# Altium PCB LIFT_CARD.PcbDoc
Units mil, origin at the board's own origin, x right, y up, seen from the top; angles counter-clockwise.
Board outline 2275 x 2920 mil, 2 copper layers (Top Layer, Bottom Layer), stack 54.768 mil thick; 39 components, 26 nets, 146 pads, 688 vias.
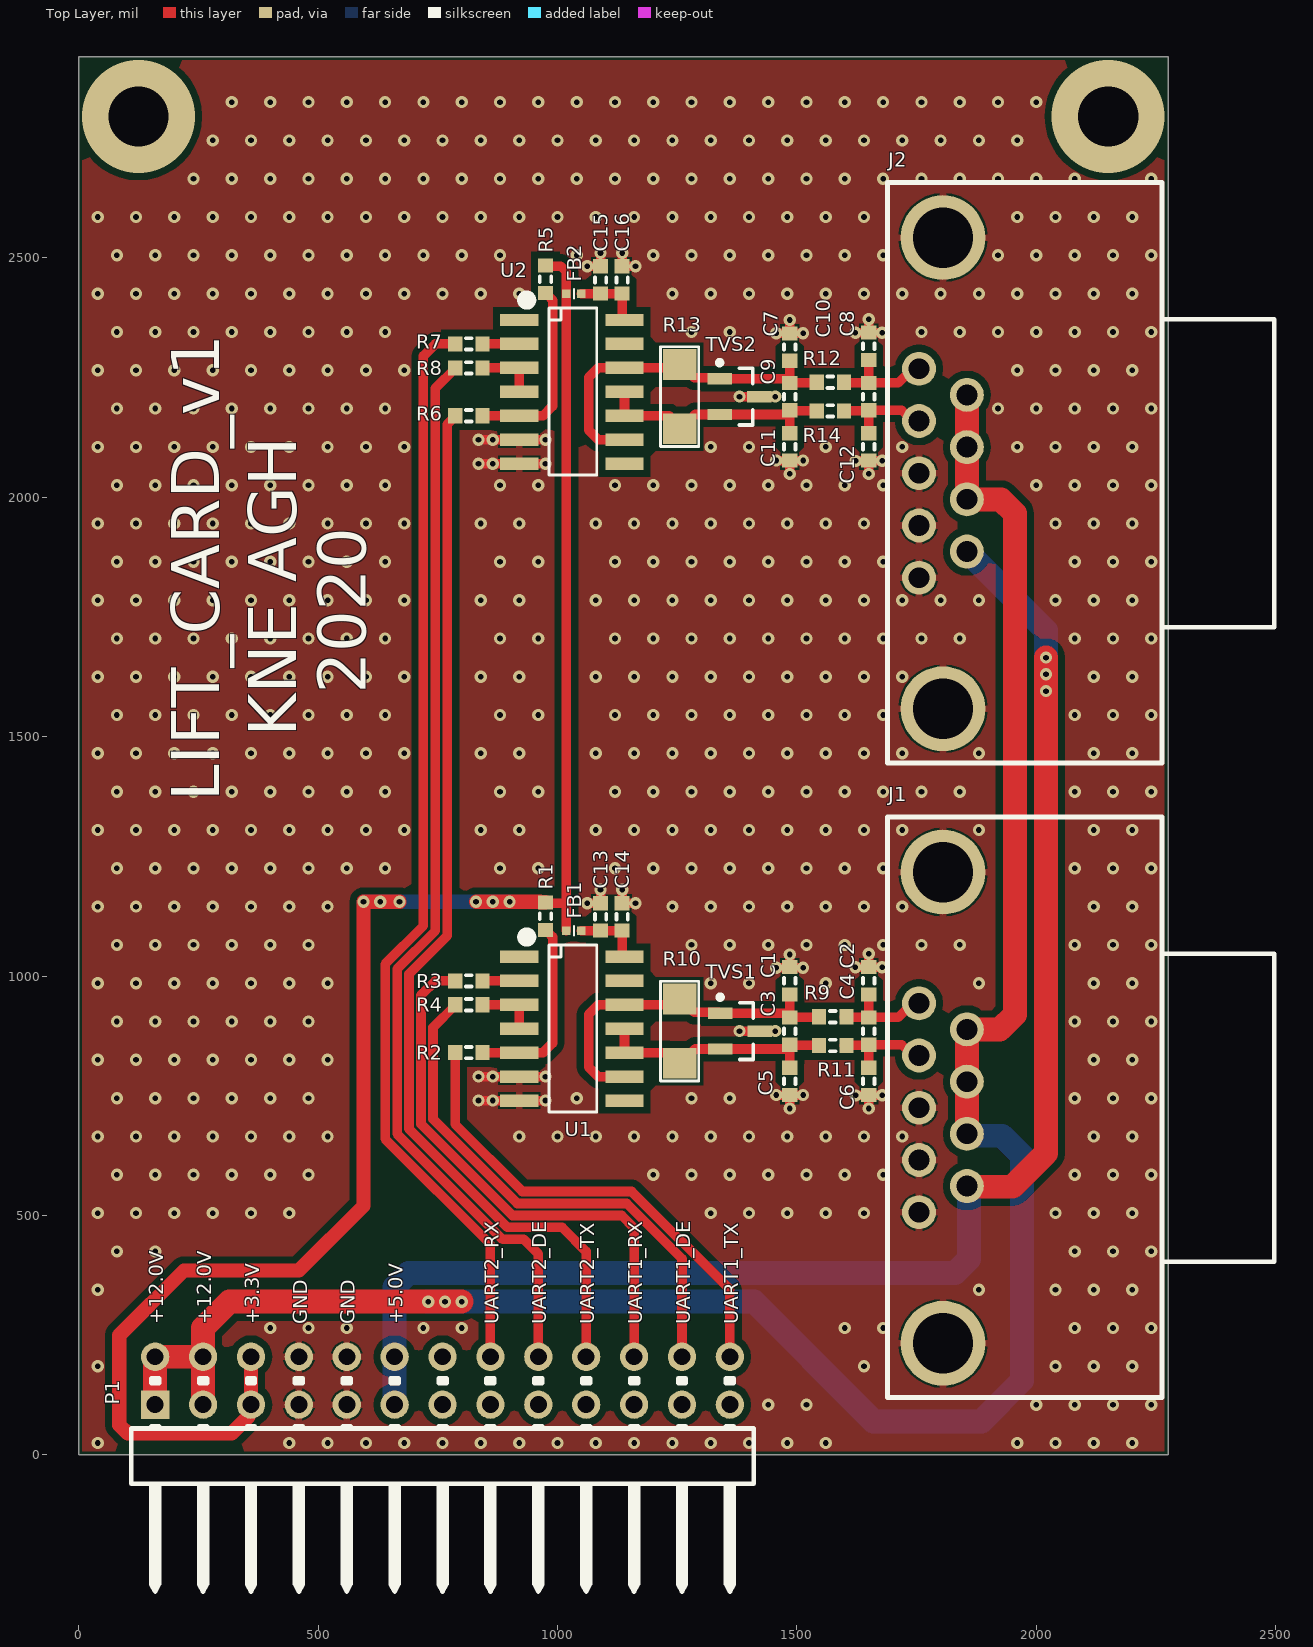
[diagram p0: Top Layer view]
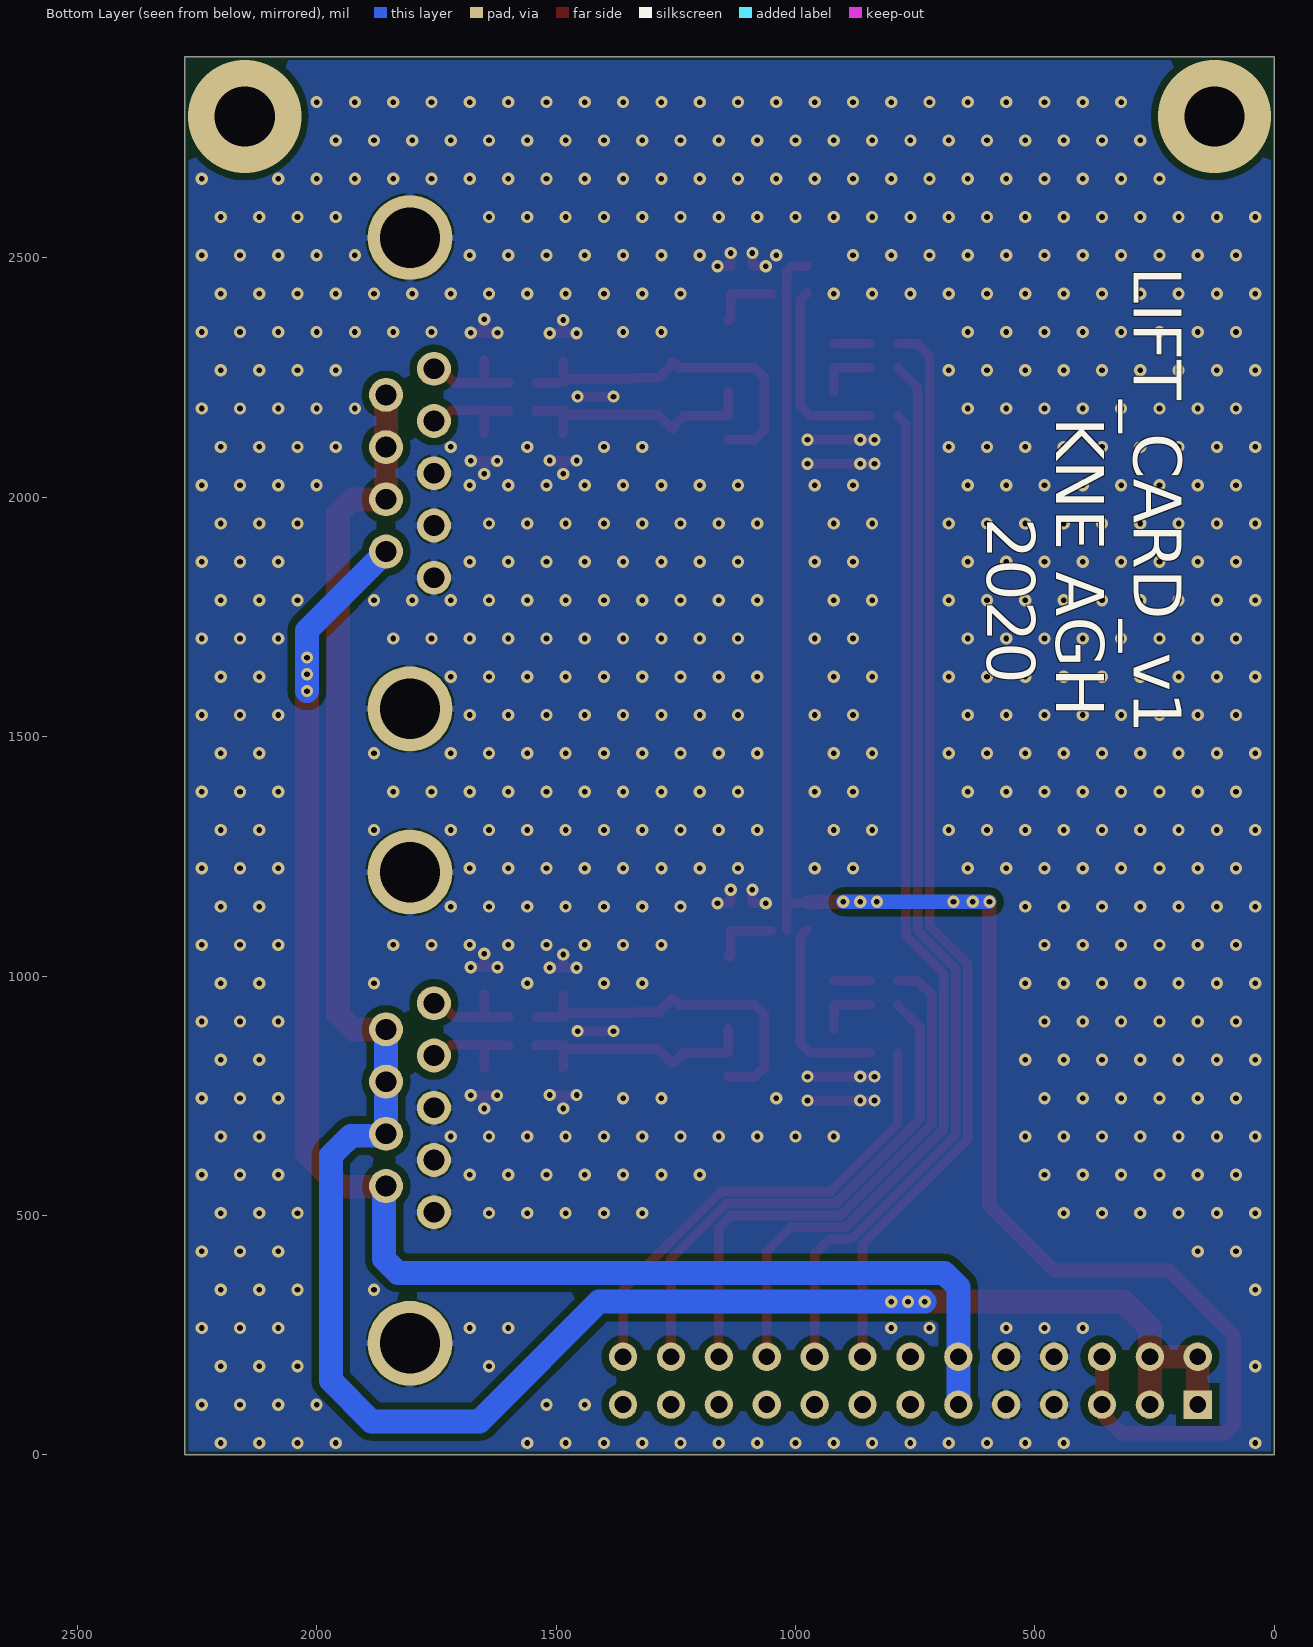
[diagram p1: Bottom Layer view, seen from below]
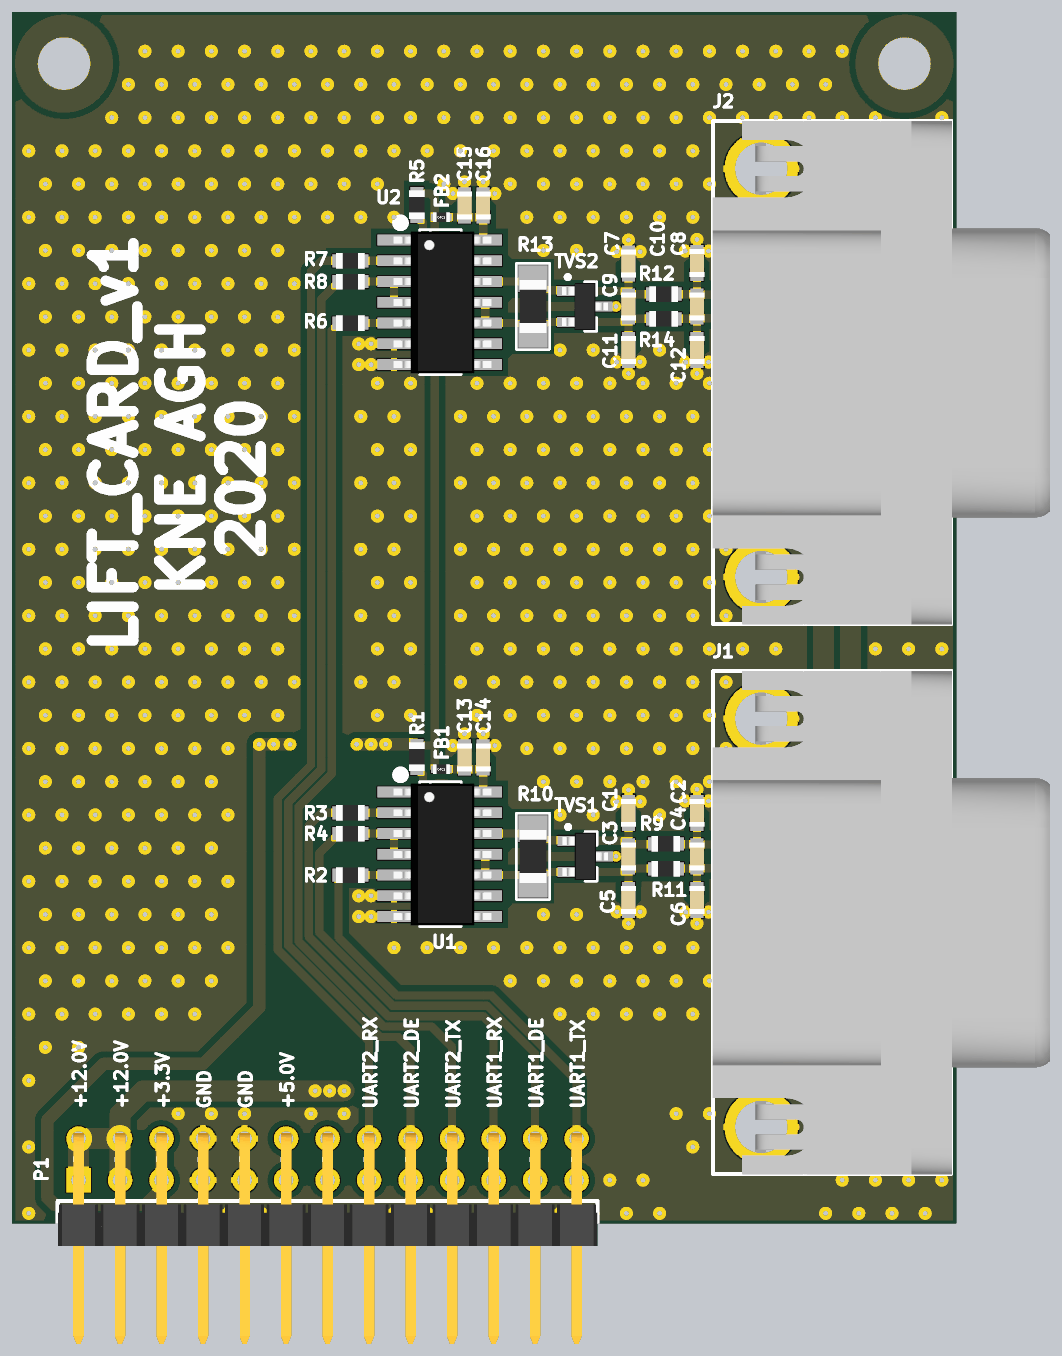
[diagram p2: 3D render of the assembled board from above, using the file's embedded part models]

## Layer stack, top to bottom
Top Solder: solder mask 0.4, Solder Resist, Dk 3.5
Top Layer: signal copper 1.4
Dielectric 1: dielectric 51.9685, FR-4, Dk 4.8
Bottom Layer: signal copper 1.4
Bottom Solder: solder mask 0.4, Solder Resist, Dk 3.5

## Board outline
0,0 2275,0 2275,2920 0,2920

## Design rules (kind name [scope] priority, off if disabled: settings)
BoardOutlineClearance P1 [All] p1: gap=7.87 ignorepadtopadclearanceinfootprint=FALSE
BoardOutlineClearance [All] p2: gap=7.87 ignorepadtopadclearanceinfootprint=FALSE
Clearance [All] p1: gap=5 ignorepadtopadclearanceinfootprint=FALSE except(7.87: Track-SMDPad; 10: Track-Hole Via-Via; 12.99: Track-THPad; 15: Arc-Poly Track-Poly SMDPad-Poly THPad-Poly Via-Poly Fill-Poly Poly-Poly Poly-Region Poly-Text Poly-Hole; 21.26: THPad-THPad)
ComponentClearance [All] p1: gap=4 collisioncheckmode=3 verticalgap=4 showdistances=TRUE
DiffPairsRouting [All] p1: maxlimit=4 minlimit=4 mostfreqgap=4 toplayer_minwidth=4 toplayer_maxwidth=71497.94 toplayer_prefwidth=4 bottomlayer_minwidth=4 bottomlayer_maxwidth=71497.94 bottomlayer_prefwidth=4 maxuncoupledlength=500
Height [All] p1: minheight=0 maxheight=71497.94 prefheight=500
HoleSize [All] p1: absolutevalues=TRUE maxlimit=248.03 minlimit=7.87 maxpercent=80.000 minpercent=20.000
HoleToHoleClearance [All] p1: gap=10 allowstackedmicrovias=FALSE
MinimumAnnularRing [All] p1: minimumring=5.12
MinimumSolderMaskSliver [All] p1: minsoldermaskwidth=0
PlaneClearance [All] p1: clearance=6
PlaneConnect [All] p1: pad.planeconnectstyle=Relief pad.reliefexpansion=11.81 pad.reliefentries=4 pad.reliefconductorwidth=15 pad.reliefairgap=4 via.planeconnectstyle=Direct via.reliefexpansion=11.81 via.reliefentries=4 via.reliefconductorwidth=5 via.reliefairgap=5
PolygonConnect [All] p1: thpad.connectstyle=Relief thpad.reliefconductorwidth=15 thpad.reliefentries=4 thpad.polygonreliefangle="90 Angle" thpad.airgapwidth=4 smdpad.connectstyle=Relief smdpad.reliefconductorwidth=15 smdpad.reliefentries=4 smdpad.polygonreliefangle="90 Angle" smdpad.airgapwidth=4 via.connectstyle=Direct via.reliefconductorwidth=5 via.reliefentries=4 via.polygonreliefangle="90 Angle" via.airgapwidth=5
RoutingVias [All] p1: holewidth=7.87 width=17.72 viastyle="Through Hole" minholewidth=7.87 minwidth=17.72 maxholewidth=248.03 maxwidth=257.87
SilkToSilkClearance [All] p1: silktosilkclearance=1
SilkToSolderMaskClearance [IsPad] p1: minsilkscreentomaskgap=2 clearancetoexposedcopper=TRUE
SolderMaskExpansion SolderMaskExpansion_VIA [IsVia] p1: expansion=-20 istentingtop=FALSE
SolderMaskExpansion [All] p2: expansion=2.95 istentingtop=FALSE
UnRoutedNet [All] p1: checkbadconnections=TRUE
Width [All] p1: maxlimit=200 minlimit=5 preferedwidth=6
19 further rules are at their usual default settings.

## Classes and differential pairs
channel class RS485_FD: Designator1
channel class protection: Designator1
component class LIFT_CARD: J1 J2 R1 R2 R3 R4 R5 R6 R7 R8
component class Designator1: C15 C16 FB2 U2
component class Designator2: C13 C14 FB1 U1

## Components (designator, comment, footprint, x,y, rotation, side; value= is the part's Value field where it differs from the comment)
C1 "Ceramic C0G" C_0603_1608 1485,990 r90 top value=1nF (schematic designator C26)
C2 "Ceramic C0G" C_0603_1608 1650,990 r90 top value=100pF (schematic designator C27)
C3 "Ceramic C0G" C_0603_1608 1485,885 r270 top value=1nF (schematic designator C28)
C4 "Ceramic C0G" C_0603_1608 1650,885 r270 top value=100pF (schematic designator C29)
C5 "Ceramic C0G" C_0603_1608 1485,780 r270 top value=1nF (schematic designator C30)
C6 "Ceramic C0G" C_0603_1608 1650,780 r270 top value=100pF (schematic designator C31)
C7 "Ceramic C0G" C_0603_1608 1485,2313.54 r90 top value=1nF (schematic designator C26)
C8 "Ceramic C0G" C_0603_1608 1650,2315 r90 top value=100pF (schematic designator C27)
C9 "Ceramic C0G" C_0603_1608 1485,2210 r270 top value=1nF (schematic designator C28)
C10 "Ceramic C0G" C_0603_1608 1650,2210 r270 top value=100pF (schematic designator C29)
C11 "Ceramic C0G" C_0603_1608 1485,2105 r270 top value=1nF (schematic designator C30)
C12 "Ceramic C0G" C_0603_1608 1650,2105 r270 top value=100pF (schematic designator C31)
C13 "Ceramic X7R" C_0603_1608 1090,1123.54 r90 top value=1uF (schematic designator C24)
C14 "Ceramic X7R" C_0603_1608 1135,1123.54 r90 top value=100nF (schematic designator C25)
C15 "Ceramic X7R" C_0603_1608 1090,2453.54 r90 top value=1uF (schematic designator C24)
C16 "Ceramic X7R" C_0603_1608 1135,2453.54 r90 top value=100nF (schematic designator C25)
FB1 "Ferrite bead" FB_0402_1005 1034.25,1095 r0 top value=BLM15EG121SH1D (schematic designator FB3)
FB2 "Ferrite bead" FB_0402_1005 1034.25,2425 r0 top value=BLM15EG121SH1D (schematic designator FB3)
J1 "DSUB 9 Pin" P_DSUB_2301843-1 1805,725 r90 top locked value=2301843-1
J2 "DSUB 9 Pin" P_DSUB_2301843-1 1805,2050 r90 top locked value=2301843-1
P1 "Goldpin male" P_HEADER_2x13_2.54_RIGHT_ANGLE 760,155 r0 top locked value=HMTSW-113-07-T-D-130-RA
R1 "Resistor" R_0603_1608 975,1125 r90 top value=100k
R2 "Resistor" R_0603_1608 815,840 r0 top value=10R
R3 "Resistor" R_0603_1608 815,990 r180 top value=10R
R4 "Resistor" R_0603_1608 815,940 r0 top value=10R
R5 "Resistor" R_0603_1608 975,2455 r90 top value=100k
R6 "Resistor" R_0603_1608 815,2170 r0 top value=10R
R7 "Resistor" R_0603_1608 815,2320 r180 top value=10R
R8 "Resistor" R_0603_1608 815,2270 r0 top value=10R
R9 "Resistor" R_0603_1608 1575,915 r180 top value=10R (schematic designator R15)
R10 "Resistor" R_1206_3216 1255,885 r90 top value=120R (schematic designator R16)
R11 "Resistor" R_0603_1608 1575,855 r180 top value=10R (schematic designator R28)
R12 "Resistor" R_0603_1608 1570,2240 r180 top value=10R (schematic designator R15)
R13 "Resistor" R_1206_3216 1255,2210 r90 top value=120R (schematic designator R16)
R14 "Resistor" R_0603_1608 1570,2180 r180 top value=10R (schematic designator R28)
TVS1 "TVS double bidirectional" SOT23_N 1381.05,885 r0 top value=CDSOT23-SM712 (schematic designator TVS5)
TVS2 "TVS double bidirectional" SOT23_N 1380,2210 r0 top value=CDSOT23-SM712 (schematic designator TVS5)
U1 "MAX3076 Series 16 Mbps 6 V Full Duplex SMT RS 485 Transceiver - SOIC-14" SOP14_SO14_SOIC14_4X9X18 1030,890 r270 top value=MAX3076EASD+
U2 "MAX3076 Series 16 Mbps 6 V Full Duplex SMT RS 485 Transceiver - SOIC-14" SOP14_SO14_SOIC14_4X9X18 1030,2220 r270 top value=MAX3076EASD+ (schematic designator U1)

## Footprints (in the part's own frame and the unit in brackets; to place one, negate y for a bottom-side part, rotate by r counter-clockwise, add the part's x,y. Pads: shape width x height; smd on the part's side, far side on the other; paste and mask are expansions set on the pad)
C_0603_1608 [mm]
  rect 0.75x0.8 smd: 1(-0.725,0) 2(0.725,0)
  silkscreen extent -0.15,-0.3 0.15,0.3, body extent -0.85,-0.45 0.85,0.45, height 0.89
FB_0402_1005 [mm]
  rect 0.45x0.45 smd: 1(-0.4,0) 2(0.4,0)
  silkscreen extent 0,-0.25 0,0.25, body extent -0.52,-0.3 0.52,0.3, height 0.34
P_DSUB_2301843-1 [mm] "D-SUB; 9 Position; Male"
  round 1.8 hole 1.1: 1(-5.54,1.27) 2(-2.77,1.27) 3(0,1.27) 4(2.77,1.27) 5(5.54,1.27) 6(-4.155,-1.27) 7(-1.385,-1.27) 8(1.385,-1.27) 9(4.155,-1.27)
  round 4.5 hole 3.2: MH(-12.495,0) MH(12.495,0)
  silkscreen extent -15.37,-17.58 15.42,2.95, body extent -15.4,-17.68 15.41,2.97, height 13.59
P_HEADER_2x13_2.54_RIGHT_ANGLE [mm] "Connector; Header; 2x13 Position; Male"
  rect 1.5x1.5 hole 0.9: 1(-15.24,-1.27)
  round 1.5 hole 0.9: 2(-15.24,1.27) 3(-12.7,-1.27) 4(-12.7,1.27) 5(-10.16,-1.27) 6(-10.16,1.27) 7(-7.62,-1.27) 8(-7.62,1.27) 9(-5.08,-1.27) 10(-5.08,1.27) 11(-2.54,-1.27) 12(-2.54,1.27) 13(0,-1.27) 14(0,1.27) 15(2.54,-1.27) 16(2.54,1.27) 17(5.08,-1.27) 18(5.08,1.27) 19(7.62,-1.27) 20(7.62,1.27) 21(10.16,-1.27) 22(10.16,1.27) 23(12.7,-1.27) 24(12.7,1.27) 25(15.24,-1.27) 26(15.24,1.27)
  silkscreen extent -16.51,-11.18 16.51,0.13, body extent -16.51,-11.3 16.51,1.6, height 5.1
R_0603_1608 [mm]
  rect 0.75x0.8 smd: 1(-0.725,0) 2(0.725,0)
  silkscreen extent -0.15,-0.3 0.15,0.3, body extent -0.87,-0.47 0.88,0.48, height 0.54
R_1206_3216 [mil]
  rect 64x70 smd: 1(-67,0) 2(67,0)
  silkscreen extent -104,-40 104,40, body extent -64,-32 64,32, height 27
SOP14_SO14_SOIC14_4X9X18 [mil]
  rect 26x80 smd: 1(-150,-110) 2(-100,-110) 3(-50,-110) 4(0,-110) 5(50,-110) 6(100,-110) 7(150,-110) 8(150,110) 9(100,110) 10(50,110) 11(0,110) 12(-50,110) 13(-100,110) 14(-150,110)
  silkscreen extent -201,-104 174,52, body extent -171,-111 171,125, height 63
SOT23_N [mm] "SOT23, 3-Leads, Body 2.9x1.3mm, Pitch 0.95mm, Lead Span 2.3mm, IPC Medium Density"
  rect 1.3x0.6 smd: 1(-1.05,0.95) 2(-1.05,-0.95) 3(1.05,0)
  silkscreen extent -1.17,-1.5 0.7,1.92, body extent -1.4,-1.45 1.4,1.45, height 1.29

## Part data
C1 C3 C5 C7 C9 C11: library part C_1nF_50V_C0G_0603_5, "Capacitor", dielectric=C0G, Manufacturer=Samsung, Manufacturer Part Number=CL10C102JB8NNNC, Tolerance (%)=5, Voltage=50V, HelpURL=http://www.tme.eu/pl/Document/7da762c1dbaf553c64ad9c40d3603826/mlcc_samsung.pdf, Part Number=C_1nF_50V_C0G_0603_5, SCH_Footprint=0603, Supplier 1=TME, Supplier 2="RS Components", Supplier 3=Farnell, Supplier 4=Mouser, Supplier 5=Digi-Key, Supplier Part Number 1=CL10C102JB8NNNC
C2 C4 C6 C8 C10 C12: library part C_100pF_50V_C0G_0603_5, "Capacitor", dielectric=C0G, Manufacturer=AVX, Manufacturer Part Number=06035A101JAT2A, Tolerance (%)=5, Voltage=50V, HelpURL=http://www.tme.eu/pl/Document/28556c2a4dfa60995042b7f5f1edb9ed/AVX-C0G.pdf, Part Number=C_100pF_50V_C0G_0603_5, SCH_Footprint=0603, Supplier 1=TME, Supplier 2="RS Components", Supplier 3=Farnell, Supplier 4=Mouser, Supplier 5=Digi-Key, Supplier Part Number 1=06035A101JAT2A
C13 C15: library part C_1uF_25V_X7R_0603_10, "Capacitor", dielectric=X7R, Manufacturer=Samsung, Manufacturer Part Number=CL10B105KA8NNNC, Tolerance (%)=10, Voltage=25V, HelpURL=http://www.tme.eu/pl/Document/4a42202b32dab16128fe107dd69598cc/samsung-chip-cap.pdf, Part Number=C_1uF_25V_X7R_0603_10, SCH_Footprint=0603, Supplier 1=TME, Supplier 2="RS Components", Supplier 3=Farnell, Supplier 4=Mouser, Supplier 5=Digi-Key, Supplier Part Number 1=CL10B105KA8NNNC
C14 C16: library part C_100nF_50V_X7R_0603_5, "Capacitor", dielectric=X7R, Manufacturer=Samsung, Manufacturer Part Number=CL10B104JB8NNNC, Tolerance (%)=5, Voltage=50V, HelpURL=http://www.tme.eu/pl/Document/4a42202b32dab16128fe107dd69598cc/samsung-chip-cap.pdf, Part Number=C_100nF_50V_X7R_0603_5, SCH_Footprint=0603, Supplier 1=TME, Supplier 2="RS Components", Supplier 3=Farnell, Supplier 4=Mouser, Supplier 5=Digi-Key, Supplier Part Number 1=CL10B104JB8NNNC
FB1 FB2: library part FB_BLM15EG121SH1D, "Ferrite Bead", Current=1.5A, Manufacturer=Murata, Manufacturer Part Number=BLM15EG121SH1D, Resistance=95mR, HelpURL=http://datasheet.octopart.com/BLM15EG121SH1D-Murata-datasheet-37129980.pdf, Part Number=FB_BLM15EG121SH1D, SCH_Footprint=0402, Supplier 1=TME, Supplier 2="RS Components", Supplier 3=Farnell, Supplier 4=Mouser, Supplier 5=Digi-Key, Supplier Part Number 4=81-BLM15EG121SH1D, Supplier Part Number 5=490-17344-1-ND
J1 J2: library part P_DSUB_2301843-1, "Header, 9-Pin", Manufacturer="TE Conectivity", Manufacturer Part Number=2301843-1, HelpURL=https://pl.mouser.com/datasheet/2/418/1/NG_CD_2301843_H-1517790.pdf, Part Number=P_DSUB_2301843-1, SCH_Footprint=P_DSUB, Supplier 1=TME, Supplier 2="RS Components", Supplier 3=Farnell, Supplier 4=Mouser, Supplier 5=Digi-Key, Supplier 6=LCSC, Supplier Part Number 3=2857982, Supplier Part Number 4=571-2301843-1, Supplier Part Number 5=A132510-ND
P1: library part P_HEADER_2x13_2.54_ANGLE, "Pin Header", Manufacturer=Samtec, Manufacturer Part Number=HMTSW-113-07-T-D-130-RA, HelpURL=https://datasheet.octopart.com/HMTSW-113-07-T-D-130-RA-Samtec-datasheet-97080704.pdf, Part Number=P_HEADER_2x13_2.54_ANGLE, SCH_Footprint="2x13 2.54mm", Supplier 1=TME, Supplier 2="RS Components", Supplier 3=Farnell, Supplier 4=Mouser, Supplier 5=Digi-Key, Supplier 6=LCSC, Supplier Part Number 4=200-HMTSW1137TD130RA, Supplier Part Number 5=HMTSW-113-07-T-D-130-RA-ND
R1 R5: library part R_100k_0603_1, Manufacturer=Royalohm, Manufacturer Part Number=0603SAF1003T5E, Power=100mW, Supplier Part Number 1=SMD0603-100K-1%, Tolerance=1%, Voltage=50V, HelpURL=http://www.tme.eu/pl/Document/b315665a56acbc42df513c99b390ad98/ROYALOHM-THICKFILM.pdf, Part Number=R_100k_0603_1, SCH_Footprint=0603, Supplier 1=TME, Supplier 2="RS Components", Supplier 3=Farnell, Supplier 4=Mouser, Supplier 5=Digi-Key, Supplier 6=LCSC, Supplier Part Number 4=667-ERJ-3EKF1003V, Supplier Part Number 5=P100KHCT-ND
R2 R3 R4 R6 R7 R8 R9 R11 R12 R14: library part R_10R_0603_1, Manufacturer=Royalohm, Manufacturer Part Number=0603SAF100JT5E, Power=100mW, Supplier Part Number 1=SMD0603-10R-1%, Tolerance=1%, Voltage=50V, HelpURL=http://www.tme.eu/pl/Document/b315665a56acbc42df513c99b390ad98/ROYALOHM-THICKFILM.pdf, Part Number=R_10R_0603_1, SCH_Footprint=0603, Supplier 1=TME, Supplier 2="RS Components", Supplier 3=Farnell, Supplier 4=Mouser, Supplier 5=Digi-Key
R10 R13: library part R_120R_1206_1, Manufacturer=Vishay, Manufacturer Part Number=CRCW1206120RFKEA, Power=250mW, Tolerance=1%, Voltage=200V, HelpURL=http://www.farnell.com/datasheets/2310790.pdf, Part Number=R_120R_1206_1, SCH_Footprint=1206, Supplier 1=TME, Supplier 2="RS Components", Supplier 3=Farnell, Supplier 4=Mouser, Supplier 5=Digi-Key, Supplier Part Number 2=6791787, Supplier Part Number 3=1653057, Supplier Part Number 4=71-CRCW1206-120-E3, Supplier Part Number 5=541-120FCT-ND
TVS1 TVS2: library part TVS_CDSOT23-SM712, Current=17A, Manufacturer=Bourns, Manufacturer Part Number=CDSOT23-SM712, Voltage=12V, HelpURL=https://datasheet.octopart.com/CDSOT23-SM712-Bourns-datasheet-13451680.pdf, Part Number=TVS_CDSOT23-SM712, SCH_Footprint=SOT23, Supplier 1=TME, Supplier 2="RS Components", Supplier 3=Farnell, Supplier 4=Mouser, Supplier 5=Digi-Key, Supplier Part Number 2=7673728, Supplier Part Number 3=1824869, Supplier Part Number 4=652-CDSOT23-SM712, Supplier Part Number 5=CDSOT23-SM712CT-ND
U1 U2: library part U_MAX3076EASD+, "RS-485/RS-422 Transceivers, +3.3V,  ±15kV ESD-Protected, Fail-Safe, Hot-Swap", Manufacturer="Maxim Integrated", Manufacturer Part Number=MAX3076EASD+, HelpURL=https://sigma.octopart.com/138901689/technical_drawing/Maxim-Integrated-MAX3076EASD%2B.pdf, Part Number=U_MAX3076EASD+, SCH_Footprint=SO14, Supplier 1=TME, Supplier 2="RS Components", Supplier 3=Farnell, Supplier 4=Mouser, Supplier 5=Digi-Key, Supplier Part Number 3=2511650, Supplier Part Number 4=700-MAX3076EASD, Supplier Part Number 5=MAX3076EASD+-ND

## Via types
v1: diameter 25.59, hole 11.81, Top Layer to Bottom Layer, 686 vias
v2: diameter 236.22, hole 125.98, Top Layer to Bottom Layer, 2 vias

## Nets (pads, with @x,y where several pads share a name; then routed paths per layer and width w, separated by ;. In a path a pad name is that pad's centre, name@x,y a point inside that pad or via, vN(x,y) a via of type N, cw(c..) or ccw(c..) an arc to the next point about the centre after c; other vN are vias at no path point)
+3.3V: FB1.1 FB2.1 P1.5 P1.6 R1.2 R5.2 | length 3856.4
  Top Layer w20: R1.2 976.15,1152.39 1018.5,1152.39 ; R5.2 976.15,2482.39 1006.79,2482.39 1018.5,2470.68 FB2.1 1018.5,1152.39 ; FB1.1 1018.5,1152.39
  Top Layer w30: P1.6 P1.5 354.44,99.44 354.44,79.44 320,45 102.57,45 85,62.57 85,250 220,385 460,385 595,520 v1(595,1155) v1(630,1155) v1(670,1155) ; v1(830,1155) v1(865,1155) v1(900,1155) 963.91,1155 965.13,1153.78 R1.2@974.25,1153.78
  Bottom Layer w30: v1(595,1155) v1(630,1155) v1(670,1155) v1(830,1155) v1(865,1155) v1(900,1155)
+5.0V: J1.6 J2.6 P1.11 P1.12 | length 3212.1
  Top Layer w50: J1.6 1856.42,560 1950,560 2020,630 v1(2020,1595) v1(2020,1630) v1(2020,1665)
  Bottom Layer w50: P1.11 660,350.71 689.29,380 1829.7,380 1858.99,409.29 1858.99,557.42 J1.6 ; J2.6 2020,1721.42 v1(2020,1665) v1(2020,1630) v1(2020,1595)
+12.0V: J1.7 J1.8 J1.9 J2.7 J2.8 J2.9 P1.1 P1.2 P1.3 P1.4 | length 4831
  Top Layer w50: P1.1 P1.2 P1.4 ; P1.3 P1.4 ; v1(800,320) v1(765,320) 315,320 260,265 P1.4 ; J1.7 J1.8 J1.9 1923.58,888.58 1955,920 1955,1966.18 1925.71,1995.47 J2.7 J2.8 J2.9
  Bottom Layer w50: v1(730,320) v1(765,320) v1(800,320) 1410,320 1645.05,84.95 1660,70 1885,70 1970,155 1970,625 1954.95,640.05 1928.52,666.48 1858.99,666.48 J1.7 J1.8 J1.9
GND: C1.2 C2.2 C5.2 C6.2 C7.2 C8.2 C11.2 C12.2 C13.2 C14.2 C15.2 C16.2 J1.1 J1.2 J1.3 J1.MH J2.1 J2.2 J2.3 J2.MH P1.7 P1.8 P1.9 P1.10 TVS1.3 TVS2.3 U1.6 U1.7 U2.6 U2.7 | length 1994.9
  Top Layer w20: v1(835,740) v1(865,740) U1.7 v1(975,740) ; v1(835,790) v1(865,790) U1.6 v1(975,790) ; v1(1062.09,1152.09) C13.2 v1(1090,1180) ; v1(1135,1180) C14.2 v1(1162.91,1152.09) ; v1(1380,885) v1(1455,885) ; v1(1380,2210) TVS2.3 v1(1455,2210) ; v1(1457.09,751.46) C5.2 ; v1(1457.09,1017.09) C1.2@1485,1017.09 ; v1(1457.09,2076.46) C11.2 ; v1(1457.09,2342.09) C7.2 ; v1(1485,723.54) C5.2 ; v1(1485,1045) C1.2@1485,1017.09 ; v1(1485,2048.54) C11.2 ; v1(1485,2370) C7.2 ; v1(1512.91,751.46) C5.2 ; v1(1512.91,1017.09) C1.2@1485,1017.09 ; v1(1512.91,2076.46) C11.2 ; v1(1512.91,2342.09) C7.2 ; v1(1622.09,1018.54) C2.2 ; v1(1622.09,2343.54) C8.2 ; v1(1623.1,750.76) C6.2@1651.01,750.76 ; v1(1623.1,2075.76) C12.2@1651.01,2075.76 ; v1(1650,723.54) C6.2 ; v1(1650,1046.46) C2.2 ; v1(1650,2048.54) C12.2 ; v1(1650,2371.46) C8.2 ; C6.2@1650.13,751.06 v1(1678.04,751.06) ; C12.2@1650.13,2076.06 v1(1678.04,2076.06) ; v1(1677.91,1018.54) C2.2 ; v1(1677.91,2343.54) C8.2 ; v1(865,2070) U2.7 ; v1(865,2070) v1(835,2070) v1(865,2070) ; v1(865,2070) U2.7 ; v1(865,2120) U2.6 ; v1(865,2120) v1(835,2120) v1(865,2120) ; v1(865,2120) U2.6 ; U2.7 v1(975,2070) U2.7 ; U2.6 v1(975,2120) U2.6 ; C15.2 v1(1090,2510) C15.2 ; C15.2 v1(1062.09,2482.09) C15.2 ; C16.2 v1(1135,2510) C16.2 ; C16.2 v1(1162.91,2482.09) C16.2
  other v1: 40,25 440,25 520,25 600,25 680,25 760,25 840,25 920,25 1000,25 1080,25 1160,25 1240,25 1320,25 1400,25 1480,25 1560,25 1960,25 2040,25 2120,25 2200,25 1440,105 1520,105 2000,105 2080,105 2160,105 2240,105 40,185 1640,185 2040,185 2120,185 2200,185 400,265 480,265 560,265 720,265 800,265 1600,265 1680,265 2080,265 2160,265 2240,265 40,345 1880,345 2040,345 2120,345 2200,345 80,425 160,425 2080,425 2160,425 2240,425 40,505 120,505 200,505 280,505 360,505 440,505 1320,505 1400,505 1480,505 1560,505 1640,505 2040,505 2120,505 2200,505 80,585 160,585 240,585 320,585 400,585 480,585 1200,585 1280,585 1360,585 1440,585 1520,585 1600,585 1680,585 2080,585 2160,585 2240,585 40,665 120,665 200,665 280,665 360,665 440,665 520,665 920,665 1000,665 1080,665 1160,665 1240,665 1320,665 1400,665 1480,665 1560,665 1640,665 1720,665 2120,665 2200,665 80,745 160,745 240,745 320,745 400,745 480,745 1040,745 1280,745 1360,745 2080,745 2160,745 2240,745 40,825 120,825 200,825 280,825 360,825 440,825 520,825 2120,825 2200,825 80,905 160,905 240,905 320,905 400,905 480,905 2080,905 2160,905 2240,905 40,985 120,985 200,985 280,985 360,985 440,985 520,985 1320,985 1400,985 1560,985 1880,985 2120,985 2200,985 80,1065 160,1065 240,1065 320,1065 400,1065 480,1065 1280,1065 1360,1065 1440,1065 1520,1065 1600,1065 1680,1065 1760,1065 1840,1065 2080,1065 2160,1065 2240,1065 40,1145 120,1145 200,1145 280,1145 360,1145 440,1145 520,1145 1240,1145 1320,1145 1400,1145 1480,1145 1560,1145 1640,1145 1720,1145 2120,1145 2200,1145 80,1225 160,1225 240,1225 320,1225 400,1225 480,1225 560,1225 640,1225 880,1225 960,1225 1120,1225 1200,1225 1280,1225 1360,1225 1440,1225 1520,1225 1600,1225 1680,1225 2080,1225 2160,1225 2240,1225 40,1305 120,1305 200,1305 280,1305 360,1305 440,1305 520,1305 600,1305 680,1305 840,1305 920,1305 1080,1305 1160,1305 1240,1305 1320,1305 1400,1305 1480,1305 1560,1305 1640,1305 1720,1305 1880,1305 2120,1305 2200,1305 80,1385 160,1385 240,1385 320,1385 400,1385 480,1385 560,1385 640,1385 880,1385 960,1385 1120,1385 1200,1385 1280,1385 1360,1385 1440,1385 1520,1385 1600,1385 1680,1385 1760,1385 1840,1385 2080,1385 2160,1385 2240,1385 40,1465 120,1465 200,1465 280,1465 360,1465 440,1465 520,1465 600,1465 680,1465 840,1465 920,1465 1080,1465 1160,1465 1240,1465 1320,1465 1400,1465 1480,1465 1560,1465 1640,1465 1720,1465 1880,1465 2120,1465 2200,1465 80,1545 160,1545 240,1545 320,1545 400,1545 480,1545 560,1545 640,1545 880,1545 960,1545 1120,1545 1200,1545 1280,1545 1360,1545 1440,1545 1520,1545 1600,1545 1680,1545 2080,1545 2160,1545 2240,1545 40,1625 120,1625 200,1625 280,1625 360,1625 440,1625 520,1625 600,1625 680,1625 840,1625 920,1625 1080,1625 1160,1625 1240,1625 1320,1625 1400,1625 1480,1625 1560,1625 1640,1625 1720,1625 2120,1625 2200,1625 80,1705 160,1705 240,1705 320,1705 400,1705 480,1705 560,1705 640,1705 880,1705 960,1705 1120,1705 1200,1705 1280,1705 1360,1705 1440,1705 1520,1705 1600,1705 1680,1705 1760,1705 1840,1705 2080,1705 2160,1705 2240,1705 40,1785 120,1785 200,1785 280,1785 360,1785 440,1785 520,1785 600,1785 680,1785 840,1785 920,1785 1080,1785 1160,1785 1240,1785 1320,1785 1400,1785 1480,1785 1560,1785 1640,1785 1720,1785 1800,1785 1880,1785 2040,1785 2120,1785 2200,1785 80,1865 160,1865 240,1865 320,1865 400,1865 480,1865 560,1865 640,1865 880,1865 960,1865 1120,1865 1200,1865 1280,1865 1360,1865 1440,1865 1520,1865 1600,1865 1680,1865 2080,1865 2160,1865 2240,1865 40,1945 120,1945 200,1945 280,1945 360,1945 440,1945 520,1945 600,1945 680,1945 840,1945 920,1945 1080,1945 1160,1945 1240,1945 1320,1945 1400,1945 1480,1945 1560,1945 1640,1945 2040,1945 2120,1945 2200,1945 80,2025 160,2025 240,2025 320,2025 400,2025 480,2025 560,2025 640,2025 880,2025 960,2025 1120,2025 1200,2025 1280,2025 1360,2025 1440,2025 1520,2025 1600,2025 1680,2025 2000,2025 2080,2025 2160,2025 2240,2025 40,2105 120,2105 200,2105 280,2105 360,2105 440,2105 520,2105 600,2105 680,2105 1320,2105 1400,2105 1560,2105 1720,2105 1960,2105 2040,2105 2120,2105 2200,2105 80,2185 160,2185 240,2185 320,2185 400,2185 480,2185 560,2185 640,2185 1920,2185 2000,2185 2080,2185 2160,2185 2240,2185 40,2265 120,2265 200,2265 280,2265 360,2265 440,2265 520,2265 600,2265 680,2265 1960,2265 2040,2265 2120,2265 2200,2265 80,2345 160,2345 240,2345 320,2345 400,2345 480,2345 560,2345 640,2345 1280,2345 1360,2345 1760,2345 1840,2345 1920,2345 2000,2345 2080,2345 2160,2345 2240,2345 40,2425 120,2425 200,2425 280,2425 360,2425 440,2425 520,2425 600,2425 680,2425 760,2425 840,2425 920,2425 1240,2425 1320,2425 1400,2425 1480,2425 1560,2425 1640,2425 1720,2425 1800,2425 1880,2425 1960,2425 2040,2425 2120,2425 2200,2425 80,2505 160,2505 240,2505 320,2505 400,2505 480,2505 560,2505 640,2505 720,2505 800,2505 880,2505 1040,2505 1200,2505 1280,2505 1360,2505 1440,2505 1520,2505 1600,2505 1680,2505 1920,2505 2000,2505 2080,2505 2160,2505 2240,2505 40,2585 120,2585 200,2585 280,2585 360,2585 440,2585 520,2585 600,2585 680,2585 760,2585 840,2585 920,2585 1000,2585 1080,2585 1160,2585 1240,2585 1320,2585 1400,2585 1480,2585 1560,2585 1640,2585 1960,2585 2040,2585 2120,2585 2200,2585 240,2665 320,2665 400,2665 480,2665 560,2665 640,2665 720,2665 800,2665 880,2665 960,2665 1040,2665 1120,2665 1200,2665 1280,2665 1360,2665 1440,2665 1520,2665 1600,2665 1680,2665 1760,2665 1840,2665 1920,2665 2000,2665 2080,2665 2240,2665 280,2745 360,2745 440,2745 520,2745 600,2745 680,2745 760,2745 840,2745 920,2745 1000,2745 1080,2745 1160,2745 1240,2745 1320,2745 1400,2745 1480,2745 1560,2745 1640,2745 1720,2745 1800,2745 1880,2745 1960,2745 320,2825 400,2825 480,2825 560,2825 640,2825 720,2825 800,2825 880,2825 960,2825 1040,2825 1120,2825 1200,2825 1280,2825 1360,2825 1440,2825 1520,2825 1600,2825 1680,2825 1760,2825 1840,2825 1920,2825 2000,2825
NetC1_1: C1.1 C3.1 R9.2 R10.2 TVS1.1 U1.9 U1.12 | length 745
  Top Layer w20: U1.9 1085,790 1065,810 1065,920 1085,940 U1.12 1243,940 R10.2 1258,952 1285.79,924.21 1336.85,924.21 1338.66,922.4 1475.16,922.4 1484.02,913.54 C3.1 C1.1@1485,960 ; C3.1@1485.73,914.27 1540.73,914.27 R9.2@1541.46,915
NetC3_2: C3.2 C5.1 R10.1 R11.2 TVS1.2 U1.10 U1.11 | length 525
  Top Layer w20: U1.11 U1.10 1233,840 R10.1 1258,818 1287.6,847.6 1475.16,847.6 1484.02,856.46 C3.2 ; C5.1 C3.2 ; R11.2@1541.46,855 1540.73,855.73 1485.73,855.73 C3.2
NetC7_1: C7.1 C9.1 R12.2 R13.2 TVS2.1 U2.9 U2.12 | length 748
  Top Layer w20: U2.9 1085,2120 1065,2140 1065,2250 1085,2270 U2.12 1243,2270 1255,2282 R13.2@1258,2282 ; R13.2 1258,2277 1285.79,2249.21 1336.85,2249.21 TVS2.1 1475.16,2247.4 1484.02,2238.54 C9.1 C7.1 ; C9.1@1485.73,2239.27 1540.73,2239.27 R12.2
NetC9_2: C9.2 C11.1 R13.1 R14.2 TVS2.2 U2.10 U2.11 | length 528
  Top Layer w20: U2.11 U2.10 1233,2170 1255,2148 R13.1@1258,2148 ; R13.1 1258,2143 1287.6,2172.6 TVS2.2 1475.16,2172.6 1484.02,2181.46 C9.2 ; C11.1 C9.2 ; R14.2 1540.73,2180.73 1485.73,2180.73 C9.2
NetC13_1: C13.1 C14.1 FB1.2 U1.14 | length 143.2
  Top Layer w20: FB1.2 C13.1 C14.1 1135,1043 1138,1040 U1.14
NetC15_1: C15.1 C16.1 FB2.2 U2.14 | length 143.2
  Top Layer w20: FB2.2 C15.1 C16.1 1135,2373 1138,2370 U2.14
NetR1_1: R1.1 R2.2 U1.5 | length 398
  Top Layer w20: R2.2 U1.5 970,840 990,860 990,1081.46 980.75,1090.71 980.75,1091.69 975.98,1096.46 R1.1
NetR3_1: R3.1 U1.2 | length 76.5
  Top Layer w20: R3.1 U1.2
NetR4_2: R4.2 U1.3 U1.4 | length 126.5
  Top Layer w20: R4.2 U1.3 U1.4
NetR5_1: R5.1 R6.2 U2.5 | length 398
  Top Layer w20: R6.2 U2.5 970,2170 990,2190 990,2411.46 980.75,2420.71 980.75,2421.69 975.98,2426.46 R5.1
NetR7_1: R7.1 U2.2 | length 76.5
  Top Layer w20: R7.1 U2.2
NetR8_2: R8.2 U2.3 U2.4 | length 126.5
  Top Layer w20: R8.2 U2.3 U2.4
RS485HD_TXD+1: C2.1 C4.1 J1.5 R9.1 | length 217.2
  Top Layer w20: R9.1@1598.54,915 1599.27,914.27 1649.27,914.27 C4.1 ; C2.1 C4.1 ; J1.5 1741.24,943.11 1711.67,913.54 C4.1
RS485HD_TXD+2: C8.1 C10.1 J2.5 R12.1 | length 217.2
  Top Layer w20: R12.1 1599.27,2239.27 1649.27,2239.27 C10.1 ; C8.1 C10.1 ; J2.5 1741.24,2268.11 1711.67,2238.54 C10.1
RS485HD_TXD-1: C4.2 C6.1 J1.4 R11.1 | length 214.3
  Top Layer w20: R11.1@1598.54,855 1599.27,855.73 1649.27,855.73 C4.2 ; C6.1 C4.2 ; J1.4 1741.24,834.06 1718.83,856.46 C4.2
RS485HD_TXD-2: C10.2 C12.1 J2.4 R14.1 | length 214.3
  Top Layer w20: R14.1 1599.27,2180.73 1649.27,2180.73 C10.2 ; C12.1 C10.2 ; J2.4 1741.24,2159.06 1718.83,2181.46 C10.2
USART1_DE: P1.24 R4.1 | length 1103.3
  Top Layer w20: R4.1 786.46,939.02 740,892.56 740,701.42 916.42,525 1144.64,525 1260,409.64 P1.24
USART1_RX: P1.22 R3.2 | length 1156.9
  Top Layer w20: R3.2 745,990 715,960 715,691.07 906.07,500 1134.29,500 1160,474.29 P1.22
USART1_TX: P1.26 R2.1 | length 1006.3
  Top Layer w20: R2.1 786.46,690.32 926.78,550 1155,550 1360,345 P1.26
USART2_DE: P1.18 R8.1 | length 2263.7
  Top Layer w20: R8.1 786.46,2269.02 745,2227.56 745,1094.64 665,1014.64 665,670.36 885.36,450 930,450 960,420 P1.18
USART2_RX: P1.16 R7.2 | length 2291.1
  Top Layer w20: R7.2 745,2320 720,2295 720,1105 640,1025 640,660 860,440 P1.16
USART2_TX: P1.20 R6.1 | length 2225.2
  Top Layer w20: R6.1 786.46,2169.02 770,2152.56 770,1084.29 690,1004.29 690,680.71 895.71,475 1010,475 1060,425 P1.20
pads on no net: P1.13 P1.14 P1.15 P1.17 P1.19 P1.21 P1.23 P1.25 U1.1 U1.8 U1.13 U2.1 U2.8 U2.13
copper on no net:
  other v2: 125,2795 2150,2795

## Polygon pours and split planes (outlines as drawn)
GND on Bottom Layer "GND_L02_P000" (solid, remove dead copper, pour order 0): 0,0 2275,0 2275,2920 0,2920
GND on Top Layer "GND_L01_P001" (solid, remove dead copper, pour order 1): 0,0 2275,0 2275,2920 0,2920

## Silkscreen, mask and mechanical layers (free items; w line width, h text height)
Top Overlay:
  text "2020" at 600,1590 h100 r90
  text "KNE AGH" at 455,1500 h100 r90
  text "LIFT_CARD_v1" at 293.34,1365 h100 r90
  text "+12.0V" at 177,273 h30 r90
  text "+12.0V" at 277,273 h30 r90
  text "+3.3V" at 377,273 h30 r90
  text "GND" at 477,273 h30 r90
  text "GND" at 577,273 h30 r90
  text "+5.0V" at 677,273 h30 r90
  text "UART2_RX" at 877,273 h30 r90
  text "UART2_DE" at 977,273 h30 r90
  text "UART2_TX" at 1077,273 h30 r90
  text "UART1_RX" at 1177,273 h30 r90
  text "UART1_DE" at 1277,273 h30 r90
  text "UART1_TX" at 1377,273 h30 r90
Bottom Overlay:
  text "LIFT_CARD_v1" at 293.34,2481.31 h100 r90
  text "KNE AGH" at 455,2166.45 h100 r90
  text "2020" at 600,1956.55 h100 r90
Mechanical 1:
  the board outline again, w10